# EAGLE board Elementos 1 (EAGLE 9.7.0)

Size 193.06 x 35.01 mm. Coordinates in mm from the lower left corner, seen from the top.
Outline: 0,0 193.06,0 193.06,35.01 0,35.01 0,0
Copper layers (1*16): Top 0.035mm / dielectric 1.5mm / Bottom 0.035mm
Design rules "default": minimum track width 6mil, minimum drill 0.35mm, track to track 6mil, track to pad 6mil, pad to pad 6mil, via to via 6mil, smd to smd 6mil, copper to edge 40mil, drill to drill 6mil, minimum pad ring 10mil, minimum via ring 8mil, stop-mask expansion 4mil, vias tented up to drill 0mil, thermal gap 10mil

## Footprints (pad centres in the part's own frame; a part is rotated, then mirrored left to right if it is on the bottom)
LEDRD254W60D565H860B_G = drill 0.981 pad 1.581: 1 -1.27,0; 2 1.27,0
BATTERY-GENERIC = drill 1.118 pad 3.15 octagon: + 2.54,0; - -2.54,0
RESAD1016W63L850D250B = drill 0.83 pad 1.43: 1 -5.08,0; 2 5.08,0
78B04ST = drill 0.8: 1 -3.81,-3.81; 2 -1.27,-3.81; 3 1.27,-3.81; 4 3.81,-3.81; 5 3.81,3.81; 6 1.27,3.81; 7 -1.27,3.81; 8 -3.81,3.81
DIP762W53P254L1969H508Q14B = drill 0.743 pad 1.343: 1 -3.81,7.62; 2 -3.81,5.08; 3 -3.81,2.54; 4 -3.81,0; 5 -3.81,-2.54; 6 -3.81,-5.08; 7 -3.81,-7.62; 8 3.81,-7.62; 9 3.81,-5.08; 10 3.81,-2.54; 11 3.81,0; 12 3.81,2.54; 13 3.81,5.08; 14 3.81,7.62

## Placement (x,y rotation side)
D1  GREEN  [LEDRD254W60D565H860B_G]  185.46,16.59 0 top
P1  BATTERYGENERIC  [BATTERY-GENERIC]  8.26,13.99 180 top
R1  1k  [RESAD1016W63L850D250B]  39.41,8.97 90 top
R2  1k  [RESAD1016W63L850D250B]  41.95,8.97 90 top
R3  1k  [RESAD1016W63L850D250B]  44.49,8.97 90 top
R4  3.3k  [RESAD1016W63L850D250B]  186.73,8.97 90 top
SW1  SPST-478B04ST  [78B04ST]  43.22,25.48 0 top
U1  74HC32_PDIP  [DIP762W53P254L1969H508Q14B]  174.03,25.48 90 top
U2  74HC11_PDIP  [DIP762W53P254L1969H508Q14B]  153.71,25.48 90 top
U3  74HC11_PDIP  [DIP762W53P254L1969H508Q14B]  133.39,25.48 90 top
U4  74HC04_PDIP  [DIP762W53P254L1969H508Q14B]  113.07,25.48 90 top
U5  74HC08_PDIP  [DIP762W53P254L1969H508Q14B]  69.89,25.48 90 top

## Library data of the parts
D1 = Tinkercad; CATEGORY: Opto-Electronic; SUB-CATEGORY: LED; VALUE: LED_GREEN
P1 R1-R4 SW1 U1-U5 = Tinkercad

## Nets
D1_C: D1.2 R4.2
P1+: P1.+ SW1.6 SW1.7 SW1.8 U1.14 U2.14 U3.14 U4.14
P1-: P1.- R1.1 R2.1 R3.1 R4.1 U1.7 U2.7 U3.7 U4.7
U1_1Y: D1.1 U1.3
U1_3Y: U1.2 U1.8
U1_4A: U1.12 U2.8
U1_4Y: U1.1 U1.11
U2_1Y: U1.10 U2.12
U3_1Y: U1.9 U3.12
U3_2Y: U1.13 U3.6
U4_1A: R1.2 SW1.1 U2.9 U2.13 U4.1
U4_1Y: U3.1 U3.4 U4.2
U4_2A: R3.2 SW1.3 U2.2 U3.2 U4.3
U4_2Y: U2.10 U3.3 U4.4
U4_6A: R2.2 SW1.2 U2.1 U3.5 U4.13
U4_6Y: U2.11 U3.13 U4.12

## Tracks (layer width: path | path; a pad name or v marks a point on that pad's centre or on a via)
D1_C  (1 unrouted)
P1+  (7 unrouted)
P1-  (8 unrouted)
U1_1Y  (1 unrouted)
U1_3Y  (1 unrouted)
U1_4A  (1 unrouted)
U1_4Y  (1 unrouted)
U2_1Y  (1 unrouted)
U3_1Y  (1 unrouted)
U3_2Y  (1 unrouted)
U4_1A  (4 unrouted)
U4_1Y  (2 unrouted)
U4_2A  (4 unrouted)
U4_2Y  (2 unrouted)
U4_6A  (4 unrouted)
U4_6Y  (2 unrouted)